# Altium PCB PCB - ROBOTIC ARM.PcbDoc
Units mm, origin at the board's own origin, x right, y up, seen from the top; angles counter-clockwise.
Board outline 100 x 65 mm, 2 copper layers (Top Layer, Bottom Layer); 25 components, 51 nets, 180 pads, 0 vias.
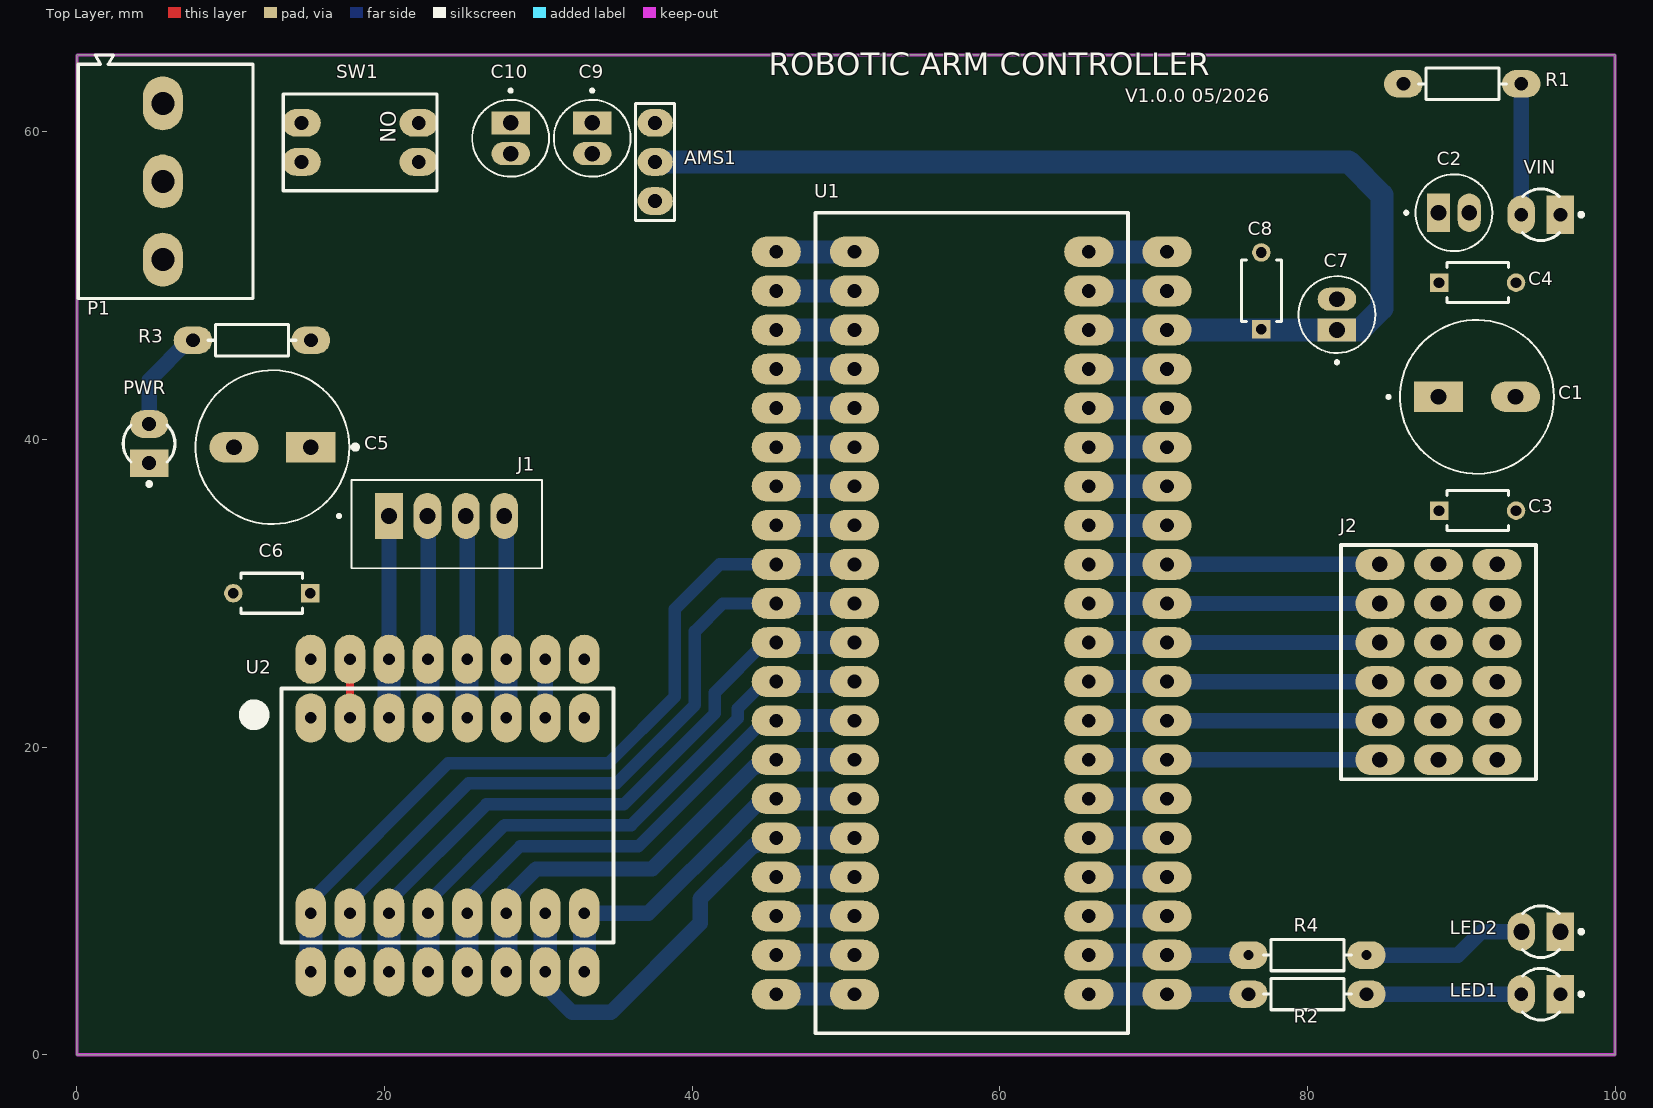
[diagram p0: Top Layer view]
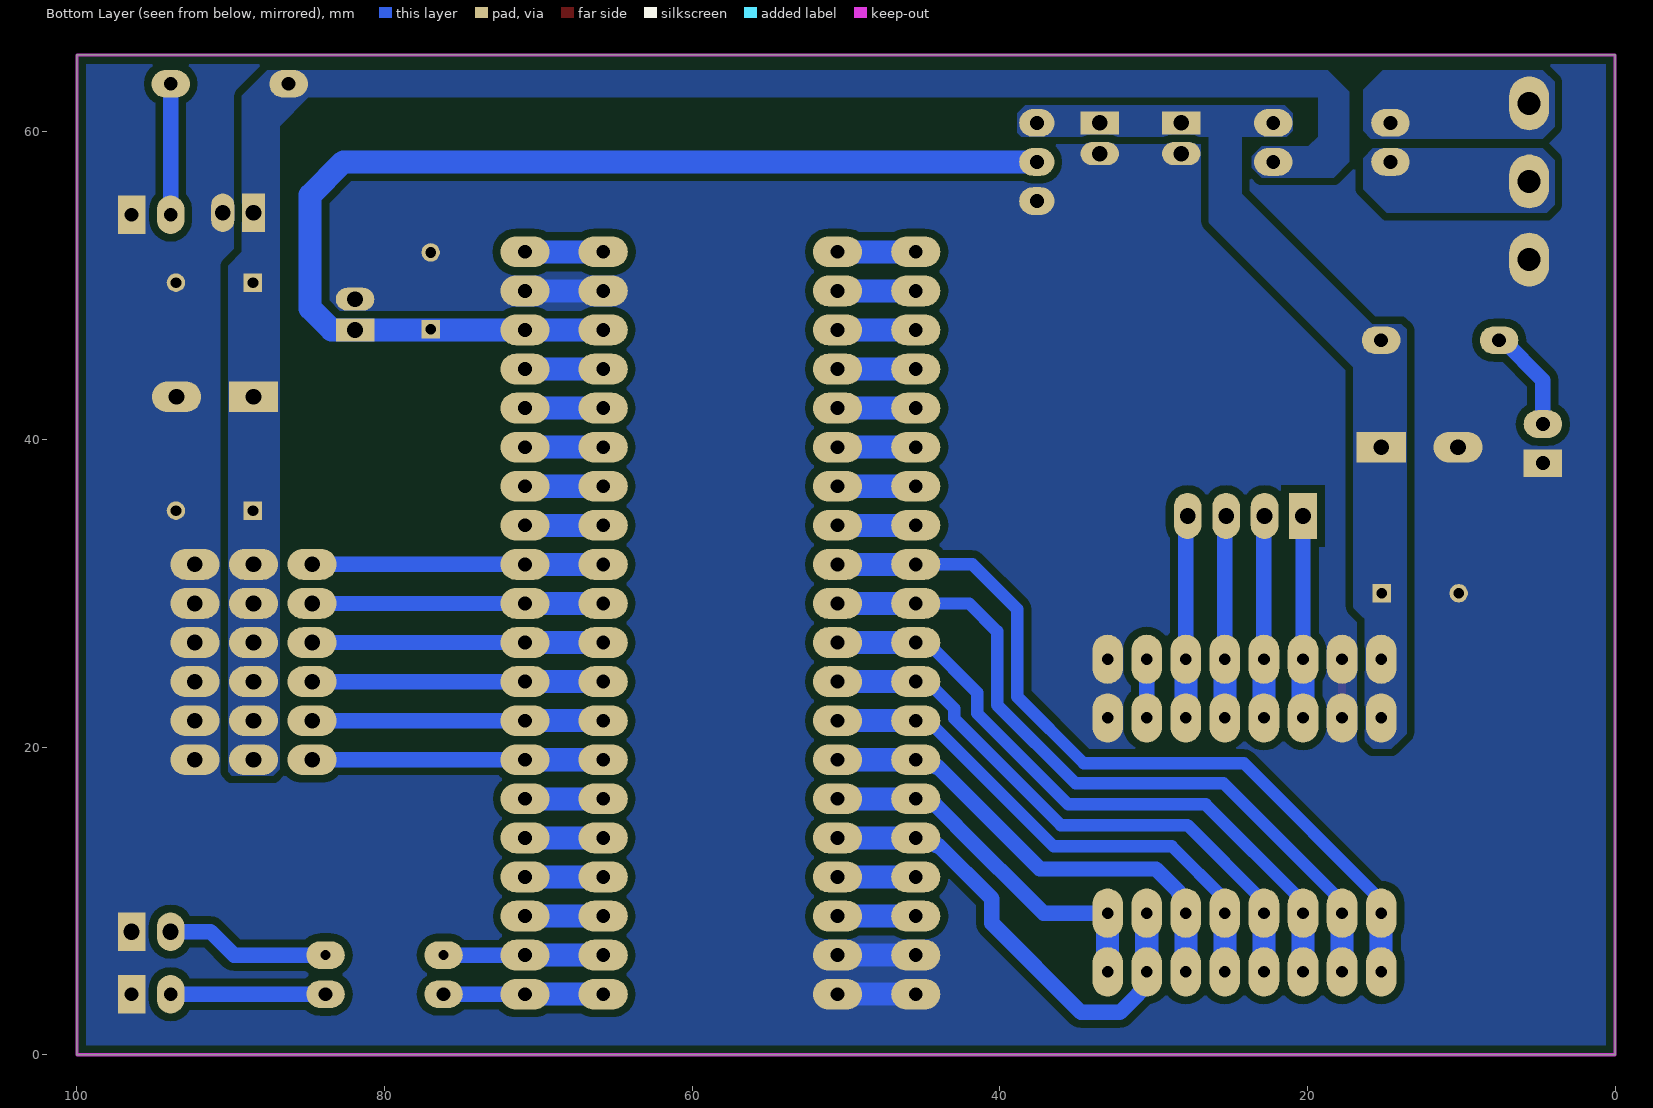
[diagram p1: Bottom Layer view, seen from below]

## Layer stack, top to bottom
Top Solder: solder mask 0.0102, Solder Resist, Dk 3.5
Top Layer: signal copper 0.0356
Dielectric 1: dielectric 0.32, FR-4, Dk 4.8
Bottom Layer: signal copper 0.0356
Bottom Solder: solder mask 0.0102, Solder Resist, Dk 3.5

## Board outline
0,0 0,65 100,65 100,0

## Design rules (kind name [scope] priority, off if disabled: settings)
Clearance [All] p1: gap=0.5 ignorepadtopadclearanceinfootprint=FALSE
MinimumSolderMaskSliver [All] p1: minsoldermaskwidth=0
PolygonConnect [All] p1: connectstyle=Direct reliefconductorwidth=0.254 reliefentries=4 polygonreliefangle="90 Angle" airgapwidth=0.254
RoutingLayers [All] p1: top layer_v5=TRUE bottom layer_v5=FALSE
RoutingVias [All] p1 off: holewidth=0.711 width=1.27 viastyle="Through Hole" minholewidth=0.711 minwidth=1.27 maxholewidth=0.711 maxwidth=1.27
SilkToSilkClearance [All] p1: silktosilkclearance=0
SilkToSolderMaskClearance [IsPad] p1: minsilkscreentomaskgap=0 clearancetoexposedcopper=TRUE
SolderMaskExpansion [All] p1: expansion=0.102 istentingtop=FALSE
SupplyNets "Schematic Supply Nets_8" [InNet('3V33')] p1: voltage=0,000
SupplyNets "Schematic Supply Nets_7" [InNet('3VB')] p2: voltage=0,000
SupplyNets "Schematic Supply Nets_6" [InNet('3V3')] p3: voltage=0,000
SupplyNets "Schematic Supply Nets_5" [InNet('GND')] p4: voltage=0,000
SupplyNets "Schematic Supply Nets_4" [InNet('Vin')] p5: voltage=0,000
SupplyNets "Schematic Supply Nets_3" [InNet('input_12V')] p6: voltage=0,000
SupplyNets "Schematic Supply Nets_2" [InNet('5V')] p7: voltage=0,000
SupplyNets "Schematic Supply Nets_1" [InNet('12V')] p8: voltage=0,000
SupplyNets "Schematic Supply Nets" [InNet('input_Vin')] p9: voltage=0,000
Width [All] p1: maxlimit=1.5 minlimit=0.5 preferedwidth=1
26 further rules are at their usual default settings.

## Components (designator, comment, footprint, x,y, rotation, side; value= is the part's Value field where it differs from the comment)
AMS1 "AMS1117-5.0" HDR1X3 37.592,60.579 r270 top
C1 "1000uF" *CAPPRD500W60D1000H1600_ECA1CM102(Primary) 91.019,42.769 r0 top
C2 "1000uF" *CAPPRD200W50D550H1250 89.519,54.737 r0 top
C3 "100nF" *CAPRR508W50L508T317H508 91.059,35.371 r0 top
C4 "100nF" *CAPRR508W50L508T317H508 91.059,50.192 r0 top
C5 "100uF" *CAPPRD500W60D1000H1600_ECA1CM102(Primary) 12.71,39.5 r180 top
C6 "100nF" *CAPRR508W50L508T317H508 12.67,30 r180 top
C7 "10uF" *CAPPRD200W50D550H1250 81.915,48.117 r90 top
C8 "100nF" *CAPRR508W50L508T317H508 77,49.657 r90 top
C9 "10uF" *CAPPRD200W50D550H1250 33.5,59.579 r270 top
C10 "100nF" *CAPPRD200W50D550H1250 28.2,59.579 r270 top
J1 "B4B-XH-A(LF)(SN)" *JST_B4B-XH-A(LF)(SN) 24.04,34.5 r180 top
J2 "CONNECTOR_SERVO_6X3*2.54" CONNECTOR_SERVO_6X3*2.54 88.519,25.527 r0 top
LED1 "LED1" FP-VSLB3940-MFG#1 95.173,3.937 r180 top
LED2 "LED1" FP-VSLB3940-MFG#2 95.173,8 r180 top
P1 "3X_connecteurbornier5.08_1" 3X_CONNECTEUR_BORNIER_5.08 5.763,56.769 r270 top
PWR "LED1" FP-VSLB3940-MFG#1 4.695,39.728 r90 top
R1 "2K" FP-CMF50-0#1 90.068,63.119 r180 top
R2 "2K" FP-CMF50-0#1 80,3.937 r180 top
R3 "2K" FP-CMF50-0#1 11.375,46.45 r0 top
R4 "2K" FP-CMF50-0#2 80,6.477 r180 top
SW1 "418117170902" 418117170902 18.415,59.309 r270 top
U1 "Connector_STM32F103" CONNECTOR_STM32F103 58.166,28.067 r0 top
U2 "CONNECTOR_DRV8825" CONNECTOR_DRV8825 24.1,15.55 r90 top
VIN "LED1" FP-VSLB3940-MFG#1 95.173,54.61 r180 top (schematic designator Vin)

## Footprints (in the part's own frame and the unit in brackets; to place one, negate y for a bottom-side part, rotate by r counter-clockwise, add the part's x,y. Pads: shape width x height; smd on the part's side, far side on the other; paste and mask are expansions set on the pad)
3X_CONNECTEUR_BORNIER_5.08 [mm] "Horizontal Cable Entry with Rising Cage Clamp, pitch 5.08mm, 03p"
  oval 3.5x2.6 hole 1.5: 147(-5.08,-0.175) 148(0,-0.175) 149(5.08,-0.175)
  silkscreen extent -8.22,-5.68 7.62,5.68, body extent -8.22,-5.68 7.62,5.68, height 18.1
418117170902 [mm] "2.54 mm compact THT with flat actuator, 2p"
  oval 1.8x2.5 hole 0.9: 1(-1.27,-3.81) 2(1.27,-3.81) 3(1.27,3.81) 4(-1.27,3.81)
  silkscreen extent -3.14,-5 3.14,5, body extent -3.04,-4.95 3.04,4.95, height 5.75
*CAPPRD200W50D550H1250 [mm]
  rect 1.5x2.5 hole 1.02: 1(-1,0)
  oval 1.5x2.5 hole 1.02: 2(1,0)
  silkscreen extent -3.2,-2.5 2.5,2.5, body extent -2.5,-2.5 2.5,2.5, height 12.5
*CAPPRD500W60D1000H1600_ECA1CM102(Primary) [mm]
  oval 3.2x2 hole 1.02: N(2.5,0)
  rect 3.2x2 hole 1.02: P(-2.5,0)
  silkscreen extent -5.85,-5 5,5, body extent -5,-5 5,5, height 16
*CAPRR508W50L508T317H508 [mm]
  rect 1.2x1.2 hole 0.7 paste-2539.97 mask+0: 1(-2.5,0)
  round 1.2 hole 0.7 paste-2539.97 mask+0: 2(2.5,0)
  silkscreen extent -2,-1.3 2,1.3, body extent -3.2,-1.4 3.2,1.4, height 0.25
*JST_B4B-XH-A(LF)(SN) [mm]
  rect 1.8x3 hole 1.02: 1(3.75,-0.525)
  oval 1.8x3 hole 1.02: 2(1.25,-0.525) 3(-1.25,-0.525) 4(-3.75,-0.525)
  silkscreen extent -6.2,-2.87 7.1,2.88, body extent -6.2,-2.87 6.2,2.88, height 7
CONNECTOR_DRV8825 [mm]
  oval 3.2x2 hole 0.762: 20(6.35,-8.89) 20(10.16,-8.89) 21(6.35,-6.35) 21(10.16,-6.35) 22(6.35,-3.81) 22(10.16,-3.81) 23(6.35,-1.27) 23(10.16,-1.27) 24(6.35,1.27) 24(10.16,1.27) 25(6.35,3.81) 25(10.16,3.81) 26(6.35,6.35) 26(10.16,6.35) 27(6.35,8.89) 27(10.16,8.89) 28(-10.16,-8.89) 28(-6.35,-8.89) 29(-10.16,-6.35) 29(-6.35,-6.35) 30(-10.16,-3.81) 30(-6.35,-3.81) 31(-10.16,-1.27) 31(-6.35,-1.27) 32(-10.16,1.27) 32(-6.35,1.27) 33(-10.16,3.81) 33(-6.35,3.81) 34(-10.16,6.35) 34(-6.35,6.35) 35(-10.16,8.89) 35(-6.35,8.89)
  silkscreen extent -8.25,-10.79 8.25,10.79, body extent -7.63,-10.16 7.63,10.16, height 8.75
CONNECTOR_SERVO_6X3*2.54 [mm]
  oval 3.2x2 hole 1.02: 17(0,1.27) 20(-3.81,-6.35) 21(-3.81,-3.81) 22(-3.81,-1.27) 23(-3.81,1.27) 24(-3.81,3.81) 25(-3.81,6.35) 26(0,-6.35) 27(0,-3.81) 28(0,-1.27) 29(0,3.81) 30(0,6.35) 31(3.81,-6.35) 32(3.81,-3.81) 33(3.81,-1.27) 34(3.81,1.27) 35(3.81,3.81) 36(3.81,6.35)
  silkscreen extent -6.35,-7.62 6.35,7.62, body extent -5.08,-7.62 5.08,7.62, height 8.6
CONNECTOR_STM32F103 [mm]
  oval 3.2x2 hole 0.9: 105(7.62,24.13) 105(12.7,24.13) 106(7.62,21.59) 106(12.7,21.59) 107(7.62,19.05) 107(12.7,19.05) 108(7.62,16.51) 108(12.7,16.51) 109(7.62,13.97) 109(12.7,13.97) 110(7.62,11.43) 110(12.7,11.43) 111(7.62,8.89) 111(12.7,8.89) 112(7.62,6.35) 112(12.7,6.35) 113(7.62,3.81) 113(12.7,3.81) 114(7.62,1.27) 114(12.7,1.27) 115(7.62,-1.27) 115(12.7,-1.27) 116(7.62,-3.81) 116(12.7,-3.81) 117(7.62,-6.35) 117(12.7,-6.35) 118(7.62,-8.89) 118(12.7,-8.89) 119(7.62,-11.43) 119(12.7,-11.43) 120(7.62,-13.97) 120(12.7,-13.97) 121(7.62,-16.51) 121(12.7,-16.51) 122(7.62,-19.05) 122(12.7,-19.05) 123(7.62,-21.59) 123(12.7,-21.59) 124(7.62,-24.13) 124(12.7,-24.13) 126(-12.7,24.13) 126(-7.62,24.13) 127(-12.7,21.59) 127(-7.62,21.59) 128(-12.7,19.05) 128(-7.62,19.05) 129(-12.7,16.51) 129(-7.62,16.51) 130(-12.7,13.97) 130(-7.62,13.97) 131(-12.7,11.43) 131(-7.62,11.43) 132(-12.7,8.89) 132(-7.62,8.89) 133(-12.7,6.35) 133(-7.62,6.35) 134(-12.7,3.81) 134(-7.62,3.81) 135(-12.7,1.27) 135(-7.62,1.27) 136(-12.7,-1.27) 136(-7.62,-1.27) 137(-12.7,-3.81) 137(-7.62,-3.81) 138(-12.7,-6.35) 138(-7.62,-6.35) 139(-12.7,-8.89) 139(-7.62,-8.89) 140(-12.7,-11.43) 140(-7.62,-11.43) 141(-12.7,-13.97) 141(-7.62,-13.97) 142(-12.7,-16.51) 142(-7.62,-16.51) 143(-12.7,-19.05) 143(-7.62,-19.05) 144(-12.7,-21.59) 144(-7.62,-21.59) 145(-12.7,-24.13) 145(-7.62,-24.13)
  silkscreen extent -10.16,-26.67 10.16,26.67, body extent -11.53,-27.08 11.47,30.73, height 15.1
FP-CMF50-0#1 [mm]
  oval 2.5x1.8 hole 0.9 paste-2539.97 mask+0: 1(-3.835,0) 2(3.835,0)
  silkscreen extent -2.86,-1.02 2.86,1.02, body extent -4.51,-1.11 4.51,1.11, height 0.25
FP-CMF50-0#2 [mm]
  oval 2.5x1.8 hole 0.65 paste-2539.97 mask+0: 1(-3.835,0) 2(3.835,0)
  silkscreen extent -2.86,-1.02 2.86,1.02, body extent -4.51,-1.11 4.51,1.11, height 0.25
FP-VSLB3940-MFG#1 [mm]
  rect 1.8x2.5 hole 0.9 paste-2539.97 mask+0: 1(-1.27,0)
  oval 1.8x2.5 hole 0.9 paste-2539.97 mask+0: 2(1.27,0)
  silkscreen extent -2.75,-1.68 1.2,1.68, body extent -2.32,-2.32 2.32,2.32, height 0.25
FP-VSLB3940-MFG#2 [mm]
  rect 1.8x2.5 hole 1.05 paste-2539.97 mask+0: 1(-1.27,0)
  oval 1.8x2.5 hole 1.05 paste-2539.97 mask+0: 2(1.27,0)
  silkscreen extent -2.75,-1.68 1.2,1.68, body extent -2.32,-2.32 2.32,2.32, height 0.25
HDR1X3 [mm] "Connector; Header; 3 Position"
  oval 1.8x2.3 hole 0.9: 1(0,0) 2(2.54,0) 3(5.08,0)
  silkscreen extent -1.27,-1.27 6.35,1.27

## Part data
AMS1: library part "Header 3", "Header, 3-Pin", LatestRevisionDate=17-Jul-2002, LatestRevisionNote="Re-released for DXP Platform.", Publisher="Altium Limited"
C1 C5: library part ECA1CM102, "1000Ã‚ÂµF 16V Aluminum Electrolytic Capacitors Radial, Can 2000 Hrs @ 85Ã‚Â°C", Package="RADIAL-2 Panasonic", Availability="In Stock", Check_prices=https://www.snapeda.com/parts/ECA1CM102/Panasonic/view-part/?ref=eda, MF=Panasonic, MP=ECA1CM102, PRICE=None, SnapEDA_Link=https://www.snapeda.com/parts/ECA1CM102/Panasonic/view-part/?ref=snap
C2 C7 C9: library part UVR1E100MDD, "10 Ã‚ÂµF 25 V Aluminum Electrolytic Capacitors Radial, Can - 2000 Hrs @ 85Ã‚Â°C", Package="RADIAL-2 NICHICON", Availability="In Stock", Check_prices=https://www.snapeda.com/parts/UVR1E100MDD/Nichicon/view-part/?ref=eda, MF=Nichicon, MP=UVR1E100MDD, PRICE=None, SnapEDA_Link=https://www.snapeda.com/parts/UVR1E100MDD/Nichicon/view-part/?ref=snap
C3 C4 C6 C8 C10: library part SR215E104MARTR1, "SR Series 5.08x5.08 mm 100 nF 50 V Ã‚Â±20% Tol. Z5U Radial Lead/SkyCapÃ‚Â®", Package="Radial AVX Interconnect / Elco", Availability="In Stock", Check_prices=https://www.snapeda.com/parts/SR215E104MARTR1/AVX/view-part/?ref=eda, MF=AVX, MP=SR215E104MARTR1, PRICE=None, SnapEDA_Link=https://www.snapeda.com/parts/SR215E104MARTR1/AVX/view-part/?ref=snap
J1: "HEADER, VERTICAL, 4WAY; Pitch Spacing: 2.5mm; No. of Contacts: 4Contacts; Gender: Header; Product Range: XH Series; Contact Termination Type: Through Hole; No. of Rows: 1Rows; Contact Plating: Tin Plated Contacts; Contact Material: Brass; SVHC: No SVHC (17-Dec-2015); Contact Resistance: 10mohm; Current Rating: 3A; Insulation Resistance: 1000Mohm; Operating Temperature Max: 85Ã‚Â°C; Operating Temperature Min: -25Ã‚Â°C; Voltage Rating VAC: 250V; Wire Size AWG Max: 22AWG; Wire Size AWG Min: 30AWG; Withstand Voltage: 1000V", Package=None, Availability="In Stock", Check_prices=https://www.snapeda.com/parts/B4B-XH-A%20%20(LF)(SN)/JST/view-part/?ref=eda, MF=JST, MP="B4B-XH-A  (LF)(SN)", PRICE=None, SnapEDA_Link=https://www.snapeda.com/parts/B4B-XH-A%20%20(LF)(SN)/JST/view-part/?ref=snap
LED1 LED2 PWR VIN: library part CMP-00030-18785862-1, "VSLB3940 940 nm 100 mA Â±22Â° Through Hole High Speed Infrared Emitting Diode - T-1", Case/Package=T, Forward Current=100mA, Forward Voltage=1.35V, Max Operating Temperature=85Â°C, Max Power Dissipation=160mW, Min Operating Temperature=-25Â°C, Reverse Voltage=5V, Depth=3.2mm, Fall Time=15ns, Lead Free="Lead Free", Length=3.2mm, Lens Style="Circular, Diffused, Round", Mount="Through Hole", NexarPartId=18785862, Number of Elements=1, Number of LEDs=1, Number of Pins=2, Orientation="Top View", Packaging=Bulk, Peak Wavelength=940nm, Power Dissipation=160mW, Power Rating=160mW, Radiation Hardening=No, REACH SVHC=Unknown, Rise Time=15ns, RoHS=Compliant, Test Current=100mA, Viewing Angle=44Â°, Wavelength=940nm
R1 R2 R3 R4: library part CMP-00030-43762971-1, "RN50C9532FB14 RN50 Series 0.05 W 95.3 kOhm Â± 1% Â±50 ppm/Â°C Axial Metal Film Resistor", Case/Package=Axial, Max Operating Temperature=175Â°C, Max Power Dissipation=50mW, Min Operating Temperature=-65Â°C, Resistance=95.3kÎ©, Temperature Coefficient=50ppm/Â°C, Tolerance=1%, Voltage Rating=200V, Composition="Metal Film", Contact Plating="Lead, Tin", Diameter=1.65mm, Features="Flame Retardant Coating, Military", Height=2.03mm, Lead Diameter=410Âµm, Lead Free="Contains Lead", Length=3.81mm, Military Standard=MIL-R-10509, Mount="Through Hole", NexarPartId=43762971, Number of Terminations=2, Packaging=Bulk, Power Rating=50mW, Radiation Hardening=No, RoHS=Non-Compliant, Termination=Axial, Width=1.651mm
SW1: library part CMP-1434-00002-3, "Dip Switch, 0.025A, 24Vdc, 2 Pos, Tht Rohs Compliant: Yes", Current Rating=25mA, Insulation Resistance=100MÎ©, Max Operating Temperature=85Â°C, Min Operating Temperature=-40Â°C, Voltage Rating=24V, Body Material="PBT, Polybutylene", Contact Plating=Gold, Electrical Life=2kcycles, Length=6.08mm, Mechanical Life=2kcycles, Number of Positions=2, Pitch=2.54mm, RoHS=Compliant, Termination="PC Pin", Throw Configuration=SPST, Voltage Rating (DC)=24V, Washable=No

## Nets (pads, with @x,y where several pads share a name; then routed paths per layer and width w, separated by ;. In a path a pad name is that pad's centre, name@x,y a point inside that pad or via, vN(x,y) a via of type N, cw(c..) or ccw(c..) an arc to the next point about the centre after c; other vN are vias at no path point)
3V3: U1.143 | length 5.1
  Bottom Layer w1.5: U1.143@45.466,9.017 U1.143@50.546,9.017
3V33: U1.105 | length 5.1
  Bottom Layer w1.5: U1.105@65.786,52.197 U1.105@70.866,52.197
3VB: U1.126 | length 5.1
  Bottom Layer w1.5: U1.126@45.466,52.197 U1.126@50.546,52.197
5V: AMS1.2 C7.1 C8.1 U1.107 | length 75.1
  Bottom Layer w1.5: AMS1.2 82.677,58.039 84.836,55.88 84.836,48.514 83.439,47.117 77.597,47.117 70.866,47.117 U1.107@65.786,47.117
12V: AMS1.1 C5.P C6.1 C9.1 C10.1 R3.2 SW1.4 U2.27
A1: J1.3 U2.23 | length 17
  Bottom Layer w1: J1.3 25.37,34.945 25.37,25.71 U2.23@25.37,21.9
  Bottom Layer w1.5: U2.23@25.37,21.9 U2.23@25.37,25.71
A2: J1.4 U2.22 | length 17
  Bottom Layer w1: J1.4 27.91,34.905 U2.22@27.91,21.9
  Bottom Layer w1.5: U2.22@27.91,21.9 U2.22@27.91,25.71
B1: J1.2 U2.24 | length 13.1
  Bottom Layer w1: U2.24@22.83,25.71 J1.2@22.83,34.985
  Bottom Layer w1.5: U2.24@22.83,21.9 U2.24@22.83,25.71
B2: J1.1 U2.25 | length 13.1
  Bottom Layer w1: U2.25@20.29,25.71 J1.1
  Bottom Layer w1.5: U2.25@20.29,21.9 U2.25@20.29,25.71
DIR: U1.140 U2.28 | length 24.5
  Bottom Layer w1: U2.28@32.99,9.2 37.158,9.2 42.866,14.908 42.866,14.925 44.038,16.097 44.055,16.097 44.595,16.637 U1.140@45.466,16.637
  Bottom Layer w1.5: U2.28@32.99,5.39 U2.28@32.99,9.2 ; U1.140@45.466,16.637 U1.140@50.546,16.637
ENA: U1.134 U2.35 | length 52
  Bottom Layer w0.8: U2.35@15.21,9.2 15.21,10.035 24.125,18.95 34.546,18.95 38.875,23.279 38.875,28.975 41.777,31.877 U1.134@45.091,31.877
  Bottom Layer w1.5: U2.35@15.21,5.39 U2.35@15.21,9.2 ; U1.134@45.466,31.877 U1.134@50.546,31.877
FLT: U2.21 | length 3.8
  Bottom Layer w1: U2.21@30.45,21.9 U2.21@30.45,25.71
GND: AMS1.3 C1.N C2.2 C3.2 C4.2 C5.N C6.2 C7.2 C8.2 C9.2 C10.2 J2.31 J2.32 J2.33 J2.34 J2.35 J2.36 LED1.1 LED2.1 P1.149 PWR.1 U1.106 U1.144 U1.145 U2.20 U2.26 VIN.1 | length 19.1
  Top Layer w0.5: U2.26@17.75,21.9 U2.26@17.75,25.71
  Bottom Layer w1.5: U1.145@45.466,3.937 U1.145@50.546,3.937 ; U1.144@45.466,6.477 U1.144@50.546,6.477 ; U1.106@65.786,49.657 U1.106@70.866,49.657
input_12V: P1.147 SW1.1
input_Vin: P1.148 SW1.2
M0: U1.135 U2.34 | length 48.2
  Bottom Layer w0.8: U2.34@17.75,9.2 17.75,9.947 25.453,17.65 35.085,17.65 40.175,22.74 40.175,27.525 41.987,29.337 U1.135@45.466,29.337
  Bottom Layer w1.5: U2.34@17.75,5.39 U2.34@17.75,9.2 ; U1.135@45.466,29.337 U1.135@50.546,29.337
M1: U1.136 U2.33 | length 42.6
  Bottom Layer w0.8: U2.33@20.29,9.2 20.29,9.947 26.618,16.275 35.548,16.275 41.475,22.202 41.475,23.553 44.719,26.797 U1.136@45.466,26.797
  Bottom Layer w1.5: U2.33@20.29,5.39 U2.33@20.29,9.2 ; U1.136@45.466,26.797 U1.136@50.546,26.797
M2: U1.137 U2.32 | length 38.6
  Bottom Layer w0.8: U2.32@22.83,9.2 22.83,9.947 27.808,14.925 36.037,14.925 42.966,21.854 42.966,22.504 44.719,24.257 U1.137@45.466,24.257
  Bottom Layer w1.5: U2.32@22.83,5.39 U2.32@22.83,9.2 ; U1.137@45.466,24.257 U1.137@50.546,24.257
NetLED1_2: LED1.2 R2.1 | length 10.1
  Bottom Layer w1: R2.1 LED1.2
NetLED2_2: LED2.2 R4.1 | length 10.7
  Bottom Layer w1: R4.1 89.789,6.477 91.312,8 LED2.2
NetPWR_2: PWR.2 R3.1 | length 6.8
  Bottom Layer w1: PWR.2 4.695,43.845 7.3,46.45 R3.1
NetR1_1: R1.1 VIN.2 | length 8.5
  Bottom Layer w1: VIN.2 R1.1
PA_0: U1.130 | length 5.1
  Bottom Layer w1.5: U1.130@45.466,42.037 U1.130@50.546,42.037
PA_1: U1.131 | length 5.1
  Bottom Layer w1.5: U1.131@45.466,39.497 U1.131@50.546,39.497
PA_2: U1.132 | length 5.1
  Bottom Layer w1.5: U1.132@45.466,36.957 U1.132@50.546,36.957
PA_3: U1.133 | length 5.1
  Bottom Layer w1.5: U1.133@45.466,34.417 U1.133@50.546,34.417
PA_8: U1.120 | length 5.1
  Bottom Layer w1.5: U1.120@65.786,14.097 U1.120@70.866,14.097
PA_19: U1.119 | length 5.1
  Bottom Layer w1.5: U1.119@65.786,16.637 U1.119@70.866,16.637
PB_5: U1.112 | length 5.1
  Bottom Layer w1.5: U1.112@65.786,34.417 U1.112@70.866,34.417
PB_6: U1.111 | length 5.1
  Bottom Layer w1.5: U1.111@65.786,36.957 U1.111@70.866,36.957
PB_7: U1.110 | length 5.1
  Bottom Layer w1.5: U1.110@65.786,39.497 U1.110@70.866,39.497
PB_8: U1.109 | length 5.1
  Bottom Layer w1.5: U1.109@65.786,42.037 U1.109@70.866,42.037
PB_9: U1.108 | length 5.1
  Bottom Layer w1.5: U1.108@65.786,44.577 U1.108@70.866,44.577
PB_12: R2.2 U1.124 | length 10.4
  Bottom Layer w1: U1.124@70.866,3.937 R2.2
  Bottom Layer w1.5: U1.124@65.786,3.937 U1.124@70.866,3.937
PB_13: R4.2 U1.123 | length 10.4
  Bottom Layer w1: U1.123@70.866,6.477 R4.2
  Bottom Layer w1.5: U1.123@65.786,6.477 U1.123@70.866,6.477
PB_14: U1.122 | length 5.1
  Bottom Layer w1.5: U1.122@65.786,9.017 U1.122@70.866,9.017
PB_15: U1.121 | length 5.1
  Bottom Layer w1.5: U1.121@65.786,11.557 U1.121@70.866,11.557
PC_13: U1.127 | length 5.1
  Bottom Layer w1.5: U1.127@45.466,49.657 U1.127@50.546,49.657
PC_14: U1.128 | length 5.1
  Bottom Layer w1.5: U1.128@45.466,47.117 U1.128@50.546,47.117
PC_15: U1.129 | length 5.1
  Bottom Layer w1.5: U1.129@45.466,44.577 U1.129@50.546,44.577
RESET: U1.138 U2.31 | length 34.7
  Bottom Layer w0.8: U2.31@25.37,9.2 25.37,10.095 28.825,13.55 36.5,13.55 44.667,21.717 U1.138@45.466,21.717
  Bottom Layer w1.5: U2.31@25.37,5.39 U2.31@25.37,9.2 ; U1.138@45.466,21.717 U1.138@50.546,21.717
RST: U1.142 | length 5.1
  Bottom Layer w1.5: U1.142@45.466,11.557 U1.142@50.546,11.557
SIGN1: J2.25 U1.113 | length 18.9
  Bottom Layer w1: U1.113@70.866,31.877 J2.25
  Bottom Layer w1.5: U1.113@65.786,31.877 U1.113@70.866,31.877
SIGN2: J2.24 U1.114 | length 18.9
  Bottom Layer w1: U1.114@70.866,29.337 J2.24
  Bottom Layer w1.5: U1.114@65.786,29.337 U1.114@70.866,29.337
SIGN3: J2.23 U1.115 | length 18.9
  Bottom Layer w1: U1.115@70.866,26.797 J2.23
  Bottom Layer w1.5: U1.115@65.786,26.797 U1.115@70.866,26.797
SIGN4: J2.22 U1.116 | length 18.9
  Bottom Layer w1: U1.116@70.866,24.257 J2.22
  Bottom Layer w1.5: U1.116@65.786,24.257 U1.116@70.866,24.257
SIGN5: J2.21 U1.117 | length 18.9
  Bottom Layer w1: U1.117@70.866,21.717 J2.21
  Bottom Layer w1.5: U1.117@65.786,21.717 U1.117@70.866,21.717
SIGN6: J2.20 U1.118 | length 18.9
  Bottom Layer w1: U1.118@70.866,19.177 J2.20
  Bottom Layer w1.5: U1.118@65.786,19.177 U1.118@70.866,19.177
SLEEP: U1.139 U2.30 | length 31.1
  Bottom Layer w1: U2.30@27.91,9.2 27.91,10.071 28.41,10.571 28.41,10.635 29.85,12.075 37.4,12.075 44.002,18.677 44.095,18.677 44.595,19.177 U1.139@45.466,19.177
  Bottom Layer w1.5: U2.30@27.91,5.39 U2.30@27.91,9.2 ; U1.139@45.466,19.177 U1.139@50.546,19.177
STEP: U1.141 U2.29 | length 31.2
  Bottom Layer w1: U2.29@30.45,5.39 30.45,4.519 30.99,3.979 30.99,3.962 32.202,2.75 34.725,2.75 40.525,8.55 40.525,10.15 43.972,13.597 44.095,13.597 44.595,14.097 U1.141@45.466,14.097
  Bottom Layer w1.5: U2.29@30.45,5.39 U2.29@30.45,9.2 ; U1.141@45.466,14.097 U1.141@50.546,14.097
Vin: C1.P C2.1 C3.1 C4.1 J2.17 J2.26 J2.27 J2.28 J2.29 J2.30 R1.2 SW1.3

## Polygon pours and split planes (outlines as drawn)
input_Vin on Bottom Layer "INPUT_VIN_L02_P001" (solid, remove dead copper, pour order 1): 4.699,58.928 3.937,58.166 3.937,55.245 4.445,54.737 14.859,54.737 16.383,56.261 16.383,58.293 15.748,58.928
input_12V on Bottom Layer "INPUT_12V_L02_P002" (solid, remove dead copper, pour order 2): 15.875,59.563 4.699,59.563 3.937,60.325 3.937,63.246 4.699,64.008 15.113,64.008 16.383,62.738 16.383,60.071
Vin on Bottom Layer "VIN_L02_P003" (solid, remove dead copper, pour order 3): 90.17,18.395 89.925,18.15 87.25,18.15 86.825,18.575 86.825,60.368 84.963,62.23 19.304,62.23 19.304,59.69 19.939,59.055 22.987,59.055 23.622,58.42 23.622,57.658 22.987,57.023 18.288,57.023 17.272,58.039 17.272,62.611 18.669,64.008 87.63,64.008 89.281,62.357 89.281,52.197 90.17,51.308
12V on Bottom Layer "12V_L02_P000" (solid, remove dead copper, pour order 0): 24.257,55.957 15.8,47.5 13.9,47.5 13.55,47.15 13.55,40.45 13.55,20.869 14.512,19.907 15.787,19.907 16.275,20.396 16.275,28.332 17.018,29.075 17.018,44.704 26.416,54.102 26.416,59.69 38.608,59.69 38.862,59.944 38.862,61.214 38.354,61.722 21.463,61.722 20.955,61.214 20.955,60.071 21.336,59.69 24.257,59.69
GND on Bottom Layer "GND_L02_P004" (solid, remove dead copper, pour order 4): 0,0 0,65 100,65 100,0

## Keep-outs
Keep-Out Layer:
  the board outline again, w0.2

## Silkscreen, mask and mechanical layers (free items; w line width, h text height)
Top Overlay:
  circle w1: c11.525,22.1 r0.5
  text "ROBOTIC ARM CONTROLLER" at 44.979,63.198 h2.5
  text "V1.0.0 05/2026" at 68.155,61.614 h1.5

## Text inside footprints (layer, text, board x,y; h text height)
SW1: Top Overlay "ON" at 19.715,61.379 h1 r270; Top Component Outline "2" at 15.615,58.409 h1.02 r270; Top Component Outline "ON" at 20.215,61.379 h1.02 r270; Top Component Outline "1" at 15.615,60.809 h1.02 r270